# Altium PCB LPCB219R0.PcbDoc (part 1 of 2)
Units mm, origin at the board's own origin, x right, y up, seen from the top; angles counter-clockwise.
Board outline 146 x 183.7 mm, 2 copper layers (Top Layer, Bottom Layer); 93 components, 73 nets, 356 pads, 119 vias.
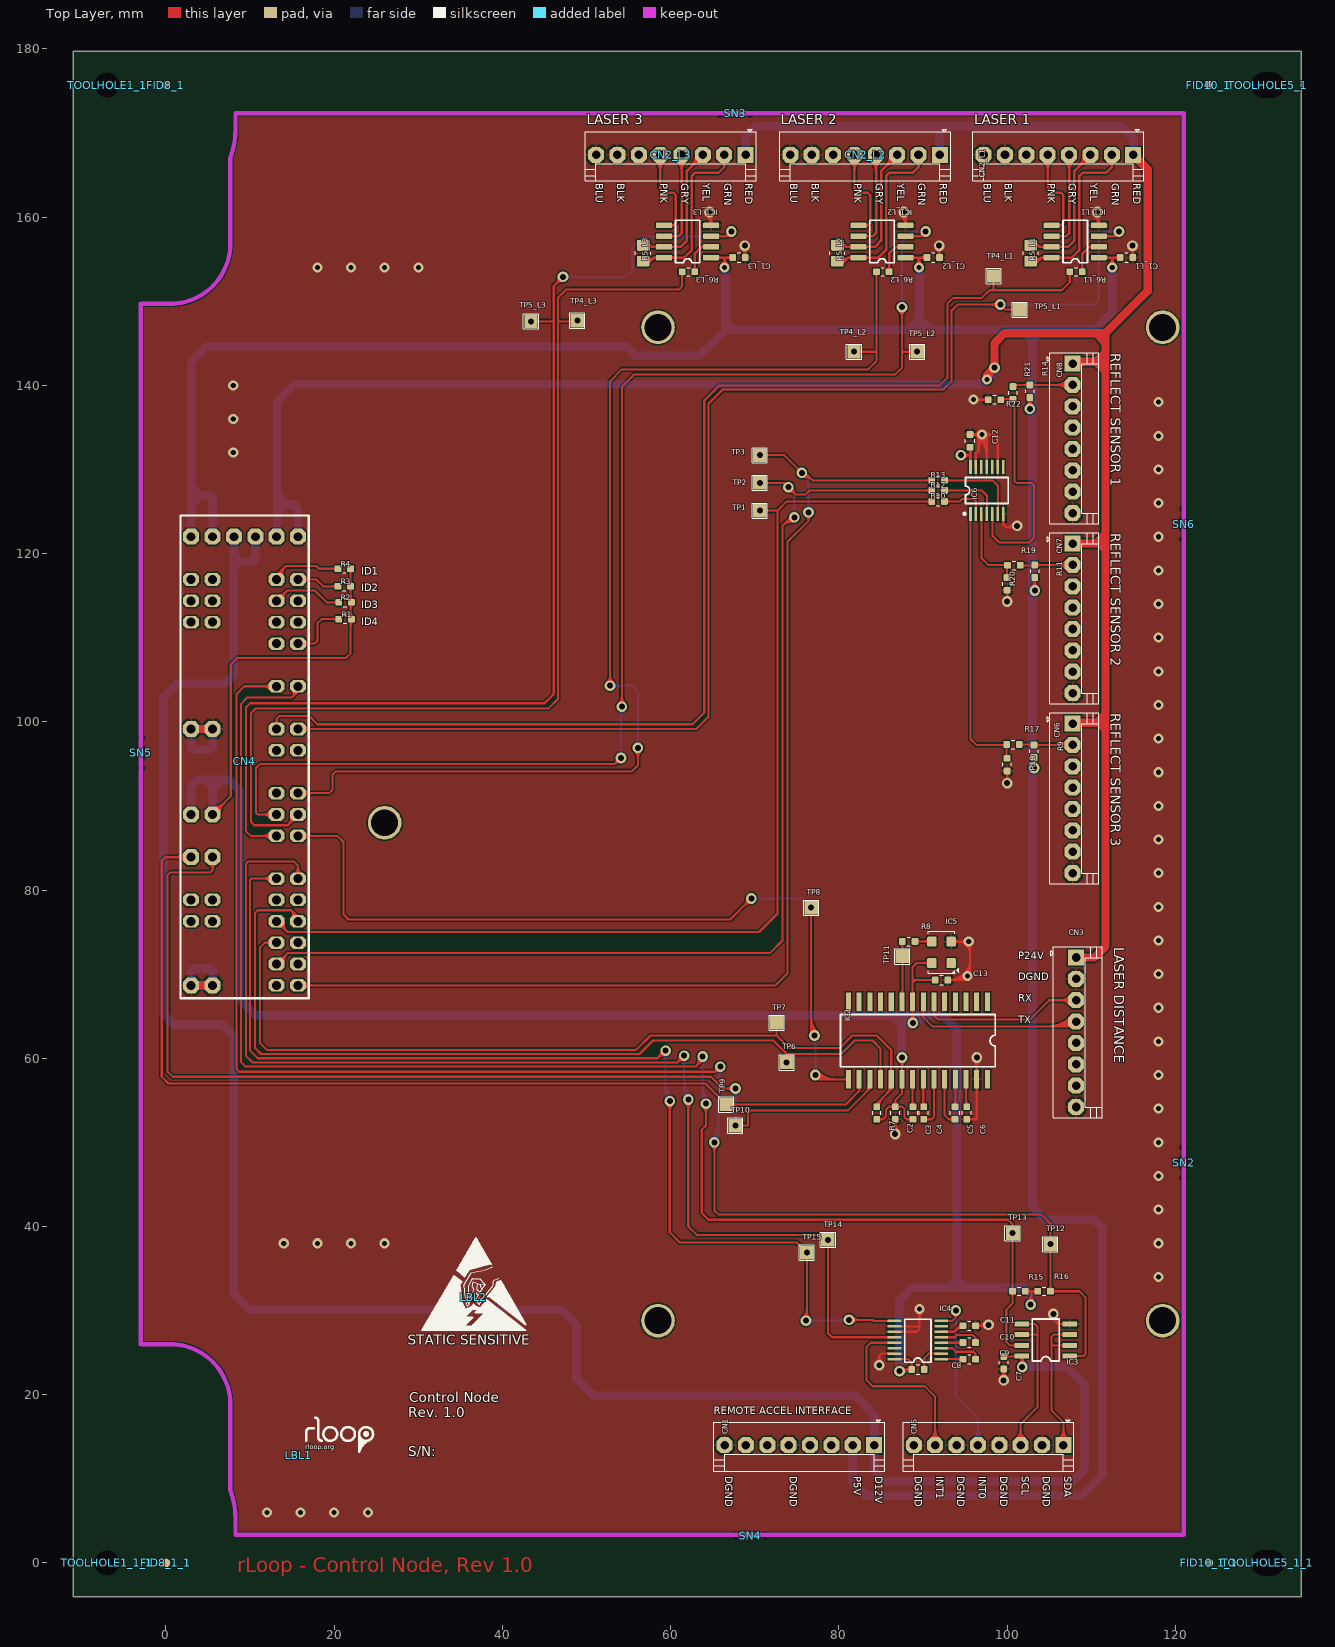
[diagram p0: Top Layer view]
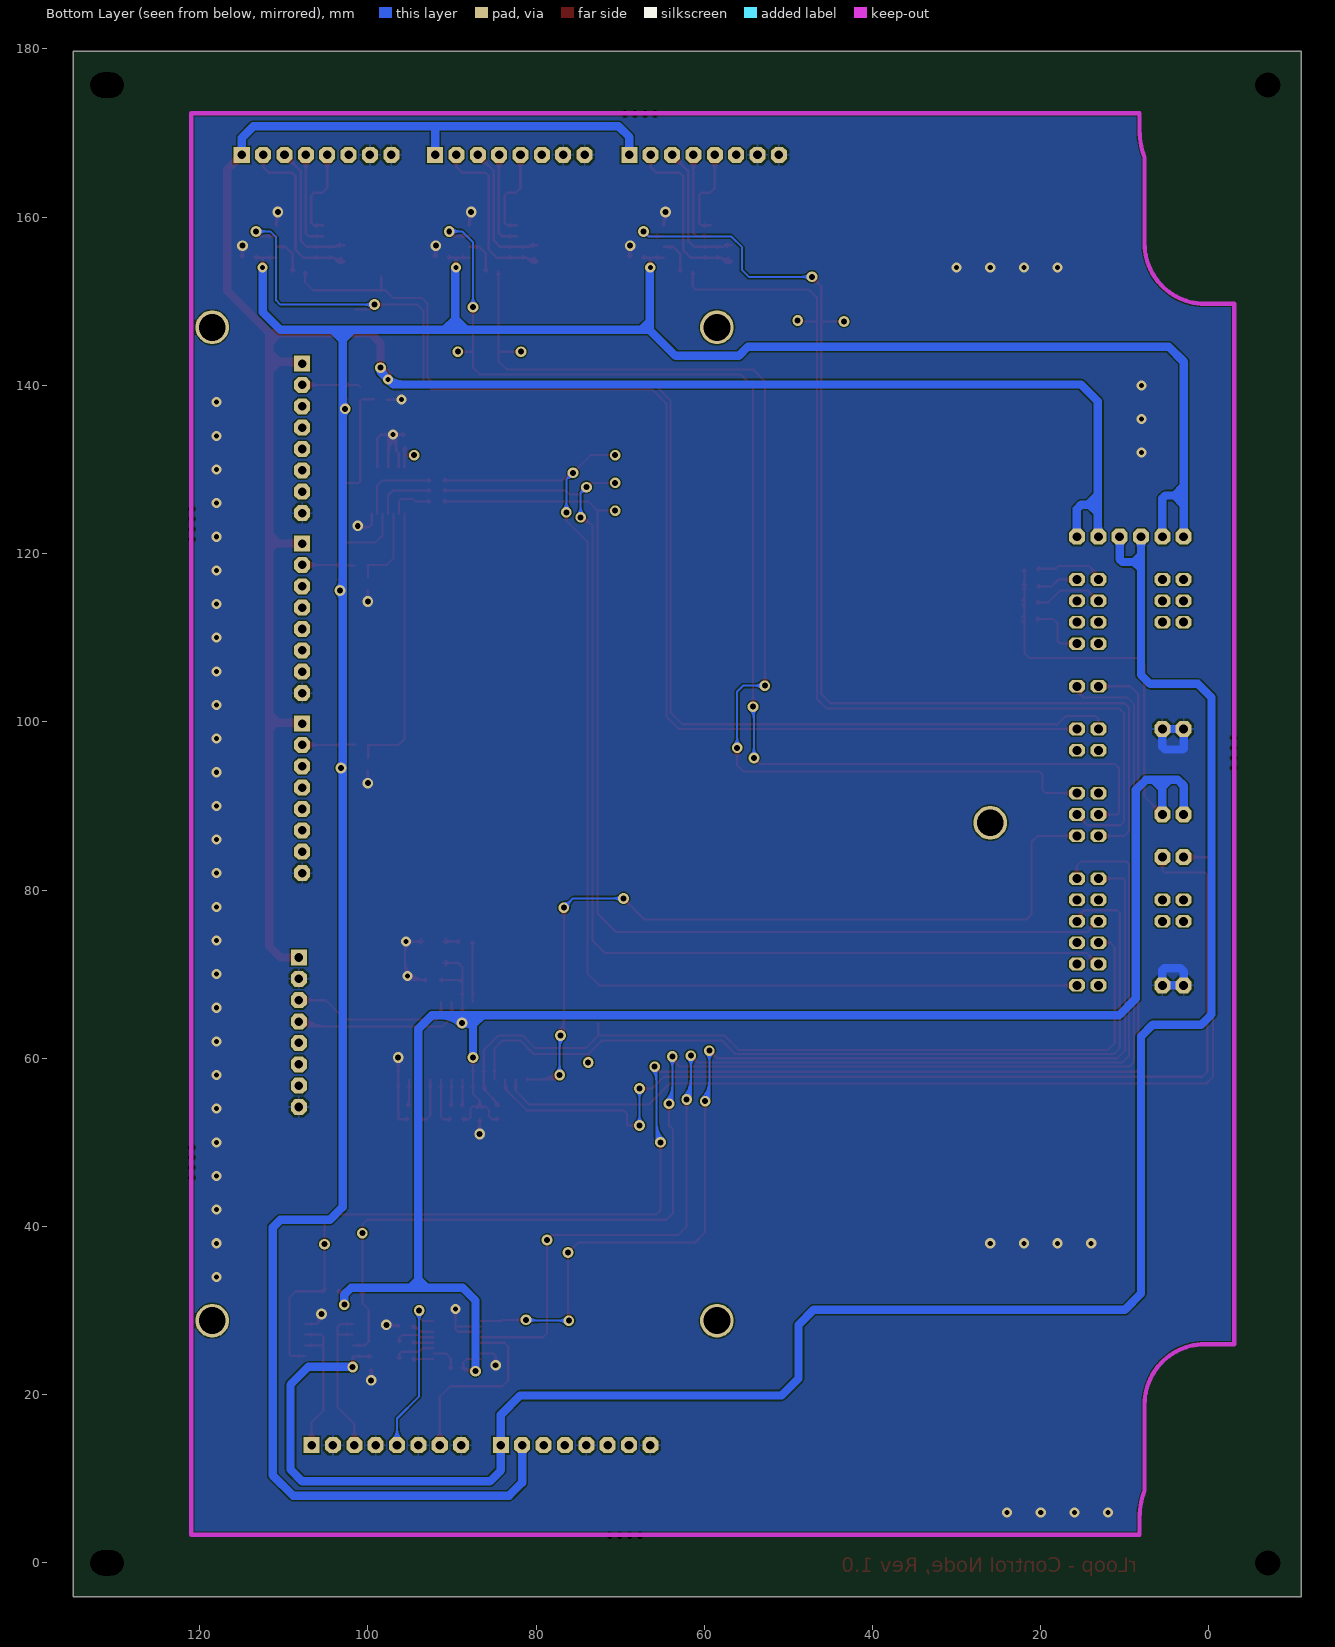
[diagram p1: Bottom Layer view, seen from below]

## Layer stack, top to bottom
Top Layer: signal copper 0.0356
Dielectric: core 0.32, FR-4, Dk 4.8
Bottom Layer: signal copper 0.0356

## Board outline
-11,-4 -11,179.695 135,179.695 135,-4

## Design rules (kind name [scope] priority, off if disabled: settings)
Clearance [All] p1: gap=0.16
HoleSize [All] p1: absolutevalues=TRUE maxlimit=5 minlimit=0.025 maxpercent=80.000 minpercent=20.000
MinimumSolderMaskSliver [All] p1 off: minsoldermaskwidth=0.1
PlaneClearance [All] p1: clearance=0.6
PolygonConnect [IsVia] p1: connectstyle=Direct reliefconductorwidth=0.254 reliefentries=4 polygonreliefangle="90 Angle" airgapwidth=0.254
PolygonConnect PolygonConnect_1 [All] p2: connectstyle=Relief reliefconductorwidth=0.254 reliefentries=4 polygonreliefangle="90 Angle" airgapwidth=0.254
RoomDefinition "LPCB219 - OVERVIEW" [InComponentClass('LPCB219 - OVERVIEW')] p1: confinementstyle=ConfineIn formatcopy=TRUE lockcomponents=FALSE outline -79.611,-108.179 -28.811,-108.179 -28.811,-82.779 -79.611,-82.779
RoomDefinition "U_LPCB219 - NODE CORE" [InComponentClass('U_LPCB219 - NODE CORE')] p2: confinementstyle=ConfineIn formatcopy=TRUE lockcomponents=FALSE outline -79.611,-108.179 -28.811,-108.179 -28.811,-82.779 -79.611,-82.779
RoomDefinition "U_LPCB219 - REMOTE ACCEL IF" [InComponentClass('U_LPCB219 - REMOTE ACCEL IF')] p3: confinementstyle=ConfineIn formatcopy=TRUE lockcomponents=FALSE outline 81.7,20 109.8,20 109.8,34.6 81.7,34.6
RoomDefinition "U_LPCB219 - REFLECT SENSORS" [InComponentClass('U_LPCB219 - REFLECT SENSORS')] p4: confinementstyle=ConfineIn formatcopy=TRUE lockcomponents=FALSE outline 88.675,144.55 88.675,78.65 112.075,78.65 112.075,144.55
RoomDefinition "U_LPCB219 - LASER DISTANCE" [InComponentClass('U_LPCB219 - LASER DISTANCE')] p5: confinementstyle=ConfineIn formatcopy=TRUE lockcomponents=FALSE outline 112.8,49.49 112.8,76.09 78.5,76.09 78.5,49.49
RoomDefinition L3 [InComponentClass('L3')] p6: confinementstyle=ConfineIn formatcopy=TRUE lockcomponents=FALSE outline 70.8,151.2 70.8,170.8 48.421,170.8 48.421,151.2
RoomDefinition L2 [InComponentClass('L2')] p7: confinementstyle=ConfineIn formatcopy=TRUE lockcomponents=FALSE outline 93.9,151.2 93.9,170.8 71.521,170.8 71.521,151.2
RoomDefinition L1 [InComponentClass('L1')] p8: confinementstyle=ConfineIn formatcopy=TRUE lockcomponents=FALSE outline 116.879,151.2 116.879,170.8 94.5,170.8 94.5,151.2
RoutingVias [All] p1: holewidth=0.6 width=1.2 viastyle="Through Hole" minholewidth=0.6 minwidth=1.2 maxholewidth=1 maxwidth=3
SilkToSilkClearance [All] p1 off: silktosilkclearance=0.254
SilkToSolderMaskClearance [IsPad] p1 off: minsilkscreentomaskgap=0.254 clearancetoexposedcopper=TRUE
SolderMaskExpansion [All] p1: expansion=0.102
Width [All] p1: maxlimit=2 minlimit=0.254 preferedwidth=0.254
23 further rules are at their usual default settings.

## Classes and differential pairs
component class L1: C1_L1 CN2_L1 IC1_L1 R5_L1 R6_L1 TP4_L1 TP5_L1
component class L2: C1_L2 CN2_L2 IC1_L2 R5_L2 R6_L2 TP4_L2 TP5_L2
component class L3: C1_L3 CN2_L3 IC1_L3 R5_L3 R6_L3 TP4_L3 TP5_L3
component class "LPCB219 - OVERVIEW": CN1 CN5 LBL1 LBL2 SN2 SN3 SN4 SN5 SN6
component class "U_LPCB219 - LASER DISTANCE": C2 C3 C4 C5 C6 C13 CN3 IC2 IC5 R7 R8 TP6 TP7 TP8 TP9 TP10 TP11
component class "U_LPCB219 - NODE CORE": CN4 R1 R2 R3 R4
component class "U_LPCB219 - REFLECT SENSORS": C12 CN6 CN7 CN8 IC6 R9 R10 R11 R12 R13 R14 R17 R18 R19 R20 R21 R22 TP1 TP2 TP3
component class "U_LPCB219 - REMOTE ACCEL IF": C7 C8 C9 C10 C11 IC3 IC4 R15 R16 TP12 TP13 TP14 TP15
net class LASER_RX[1..3]: LASER_RX1 LASER_RX2 LASER_RX3
net class LASER_TX[1..3]: LASER_TX1 LASER_TX2 LASER_TX3
channel class "LPCB219 - LASER CHANNEL": L1 L2 L3

## Components (designator, comment, footprint, x,y, rotation, side; value= is the part's Value field where it differs from the comment)
C1_L1 "100n / 50V / 10% / SMD 0603" LFP011__CC1608-0603-IPC7351_B 114.2,155.2 r0 top (schematic designator C1)
C1_L2 "100n / 50V / 10% / SMD 0603" LFP011__CC1608-0603-IPC7351_B 91.221,155.2 r0 top (schematic designator C1)
C1_L3 "100n / 50V / 10% / SMD 0603" LFP011__CC1608-0603-IPC7351_B 68.121,155.2 r0 top (schematic designator C1)
C2 "100n / 50V / 10% / SMD 0603" LFP011__CC1608-0603-IPC7351_B 86.7,53.49 r270 top
C3 "100n / 50V / 10% / SMD 0603" LFP011__CC1608-0603-IPC7351_B 88.8,53.49 r90 top
C4 "100n / 50V / 10% / SMD 0603" LFP011__CC1608-0603-IPC7351_B 90.1,53.49 r90 top
C5 "100n / 50V / 10% / SMD 0603" LFP011__CC1608-0603-IPC7351_B 93.8,53.49 r270 top
C6 "100n / 50V / 10% / SMD 0603" LFP011__CC1608-0603-IPC7351_B 95.2,53.49 r270 top
C7 "100n / 50V / 10% / SMD 0603" LFP011__CC1608-0603-IPC7351_B 99.6,23.8 r270 top
C8 "100n / 50V / 10% / SMD 0603" LFP011__CC1608-0603-IPC7351_B 89.4,23 r0 top
C9 "100n / 50V / 10% / SMD 0603" LFP011__CC1608-0603-IPC7351_B 95.5,24.2 r0 top
C10 "100n / 50V / 10% / SMD 0603" LFP011__CC1608-0603-IPC7351_B 95.5,26.2 r0 top
C11 "100n / 50V / 10% / SMD 0603" LFP011__CC1608-0603-IPC7351_B 95.5,28.2 r0 top
C12 "100n / 50V / 10% / SMD 0603" LFP011__CC1608-0603-IPC7351_B 95.6,133.4 r90 top
C13 "100n / 50V / 10% / SMD 0603" LFP011__CC1608-0603-IPC7351_B 92.2,69.29 r0 top
CN1 "640456-8" 640456-8 75.3,14 r180 top
CN2_L1 "640456-8" 640456-8 106.1,167.4 r180 top (schematic designator CN2)
CN2_L2 "640456-8" 640456-8 83.121,167.4 r180 top locked (schematic designator CN2)
CN2_L3 "640456-8" 640456-8 60.021,167.4 r180 top (schematic designator CN2)
CN3 "640456-8" 640456-8 108.2,63.09 r270 top
CN4 "RLOOP_NODE_CORE" RLOOP_NODE_CORE 3,122 r270 top locked
CN5 "640456-8" 640456-8 97.8,14 r180 top
CN6 "640456-8" 640456-8 107.8,90.9 r270 top
CN7 "640456-8" 640456-8 107.8,112.3 r270 top
CN8 "640456-8" 640456-8 107.8,133.7 r270 top
FID8_1 "FIDUCIAL" FIDTOP 0,175.695 r0 top
FID8_1_1 "FIDUCIAL" FIDTOP 0,0 r0 top
FID10_1 "FIDUCIAL" FIDTOP 124,175.695 r0 top
FID10_1_1 "FIDUCIAL" FIDTOP 124,0 r0 top
IC1_L1 "DS8921AMX/NOPB" LFP069__R-8G 108.1,157.1 r90 top (schematic designator IC1)
IC1_L2 "DS8921AMX/NOPB" LFP069__R-8G 85.121,157.1 r90 top (schematic designator IC1)
IC1_L3 "DS8921AMX/NOPB" LFP069__R-8G 62.021,157.1 r90 top (schematic designator IC1)
IC2 "MAX3111EEWI+G36" LFP024__SOIC300-28 89.4,62.09 r180 top
IC3 "P82B96D" LFP097__SOIC150-8 104.6,26.5 r90 top
IC4 "MAX3232CPWR" LFP049__TSSOP-16 89.4,26.5 r90 top
IC5 "SG5032CAN 1.843200M-TJGA3" LFP072__ASFLMB 92.2,72.59 r90 top
IC6 "SN74HC14PW" PW014 97.6,127.5 r0 top
LBL1 "RLOOP_LOGO" RLOOP_LOGO 15.8,12.8 r0 top
LBL2 "STATIC LABEL" STATIC_LABEL 36.6,31.6 r0 top
R1 "0R / 0.1W / SMD 0603" LFP020__CR1608-0603-IPC7351_B 21.3,112.2 r0 top
R2 "0R / 0.1W / SMD 0603" LFP020__CR1608-0603-IPC7351_B 21.3,114.2 r0 top
R3 "0R / 0.1W / SMD 0603" LFP020__CR1608-0603-IPC7351_B 21.2,116.1 r0 top
R4 "0R / 0.1W / SMD 0603" LFP020__CR1608-0603-IPC7351_B 21.2,118.2 r0 top
R5_L1 "120R / 0.25W / SMD 0805" LFP029__CR2012-0805 102.8,155.7 r90 top (schematic designator R5)
R5_L2 "120R / 0.25W / SMD 0805" LFP029__CR2012-0805 79.821,155.7 r90 top (schematic designator R5)
R5_L3 "120R / 0.25W / SMD 0805" LFP029__CR2012-0805 56.721,155.7 r90 top (schematic designator R5)
R6_L1 "2.2K / 0.1W / 1% / SMD 0603" LFP020__CR1608-0603-IPC7351_B 108.2,153.5 r0 top (schematic designator R6)
R6_L2 "2.2K / 0.1W / 1% / SMD 0603" LFP020__CR1608-0603-IPC7351_B 85.221,153.5 r0 top (schematic designator R6)
R6_L3 "2.2K / 0.1W / 1% / SMD 0603" LFP020__CR1608-0603-IPC7351_B 62.121,153.5 r0 top (schematic designator R6)
R7 "10K / 0.1W / 1% / SMD 0603" LFP020__CR1608-0603-IPC7351_B 84.5,53.49 r270 top
R8 "47R / 0.1W / 1% / SMD 0603" LFP020__CR1608-0603-IPC7351_B 88.3,73.89 r180 top
R9 "2.2K / 0.1W / 1% / SMD 0603" LFP020__CR1608-0603-IPC7351_B 103.2,96.5 r270 top
R10 "2.2K / 0.1W / 1% / SMD 0603" LFP020__CR1608-0603-IPC7351_B 91.8,126.2 r0 top
R11 "2.2K / 0.1W / 1% / SMD 0603" LFP020__CR1608-0603-IPC7351_B 103.3,117.9 r270 top
R12 "2.2K / 0.1W / 1% / SMD 0603" LFP020__CR1608-0603-IPC7351_B 91.8,127.5 r0 top
R13 "2.2K / 0.1W / 1% / SMD 0603" LFP020__CR1608-0603-IPC7351_B 91.8,128.7 r0 top
R14 "2.2K / 0.1W / 1% / SMD 0603" LFP020__CR1608-0603-IPC7351_B 102.7,139.3 r270 top
R15 "4.7K / 0.1W / 1% / SMD 0603" LFP020__CR1608-0603-IPC7351_B 101.4,32.3 r0 top
R16 "4.7K / 0.1W / 1% / SMD 0603" LFP020__CR1608-0603-IPC7351_B 104.4,32.3 r180 top
R17 "2.2K / 0.1W / 1% / SMD 0603" LFP020__CR1608-0603-IPC7351_B 100.7,97.3 r180 top
R18 "330R / 0.100W / 1% / SMD 0603" LFP020__CR1608-0603-IPC7351_B 100,94.9 r90 top
R19 "2.2K / 0.1W / 1% / SMD 0603" LFP020__CR1608-0603-IPC7351_B 100.8,118.6 r180 top
R20 "330R / 0.100W / 1% / SMD 0603" LFP020__CR1608-0603-IPC7351_B 100,116.4 r90 top
R21 "2.2K / 0.1W / 1% / SMD 0603" LFP020__CR1608-0603-IPC7351_B 100.7,139.1 r270 top
R22 "330R / 0.100W / 1% / SMD 0603" LFP020__CR1608-0603-IPC7351_B 98.5,138.3 r0 top
SN2 "PCB_SNAPOUT" SNAPOUT_NEW 121,45.8 r90 top
SN3 "PCB_SNAPOUT" SNAPOUT_NEW 69.452,172.348 r180 top
SN4 "PCB_SNAPOUT" SNAPOUT_NEW 71.252,3.248 r180 top
SN5 "PCB_SNAPOUT" SNAPOUT_NEW -3,94.5 r90 top
SN6 "PCB_SNAPOUT" SNAPOUT_NEW 121,121.7 r90 top
TOOLHOLE1_1 "Comment" TOOL-1#1 -7,175.695 r0 top
TOOLHOLE1_1_1 "Comment" TOOL-1#1 -7,0 r0 top
TOOLHOLE5_1 "Comment" TOOL-1#2 131,175.695 r0 top
TOOLHOLE5_1_1 "Comment" TOOL-1#2 131,0 r0 top
TP1 "SMD_TP" SMD-TP 70.6,125.1 r0 top
TP2 "SMD_TP" SMD-TP 70.6,128.4 r90 top
TP3 "SMD_TP" SMD-TP 70.6,131.7 r90 top
TP4_L1 "SMD_TP" SMD-TP 98.4,153 r0 top (schematic designator TP4)
TP4_L2 "SMD_TP" SMD-TP 81.8,144 r90 top (schematic designator TP4)
TP4_L3 "SMD_TP" SMD-TP 48.9,147.7 r90 top (schematic designator TP4)
TP5_L1 "SMD_TP" SMD-TP 101.5,149 r0 top (schematic designator TP5)
TP5_L2 "SMD_TP" SMD-TP 89.3,144 r90 top (schematic designator TP5)
TP5_L3 "SMD_TP" SMD-TP 43.4,147.6 r90 top (schematic designator TP5)
TP6 "SMD_TP" SMD-TP 73.8,59.5 r0 top
TP7 "SMD_TP" SMD-TP 72.6,64.2 r0 top
TP8 "SMD_TP" SMD-TP 76.7,77.9 r0 top
TP9 "SMD_TP" SMD-TP 66.6,54.5 r0 top
TP10 "SMD_TP" SMD-TP 67.7,52 r0 top
TP11 "SMD_TP" SMD-TP 87.55,72.1 r0 top
TP12 "SMD_TP" SMD-TP 105.15,37.9 r0 top
TP13 "SMD_TP" SMD-TP 100.65,39.2 r0 top
TP14 "SMD_TP" SMD-TP 78.7,38.4 r0 top
TP15 "SMD_TP" SMD-TP 76.2,36.9 r0 top

## Footprints (in the part's own frame and the unit in brackets; to place one, negate y for a bottom-side part, rotate by r counter-clockwise, add the part's x,y. Pads: shape width x height; smd on the part's side, far side on the other; paste and mask are expansions set on the pad)
640456-8 [mm] "Connector, Male Header, 8 Way"
  rect 1.905x1.905 hole 1.02: 1(-8.89,0)
  oct 1.905x1.905 hole 1.02: 2(-6.35,0) 3(-3.81,0) 4(-1.27,0) 5(1.27,0) 6(3.81,0) 7(6.35,0) 8(8.89,0)
  silkscreen extent -10.15,-3.04 10.17,3.1
FIDTOP [mil]
  round 40 smd mask+39.37: 1(0,0)
LFP011__CC1608-0603-IPC7351_B [mm]
  rrect25% 0.8x0.8 smd: 1(-0.75,0) 2(0.75,0)
  silkscreen extent -0.2,-0.55 0.2,0.55
LFP020__CR1608-0603-IPC7351_B [mm]
  rrect25% 0.8x0.8 smd: 1(-0.75,0) 2(0.75,0)
  silkscreen extent -0.2,-0.5 0.2,0.5
LFP024__SOIC300-28 [mm] "Small Outline; 28 Leads; Body Width 7.5 mm; Pitch 1.27 mm"
  rect 0.6x2.2 smd: 1(-8.255,-4.6) 2(-6.985,-4.6) 3(-5.715,-4.6) 4(-4.445,-4.6) 5(-3.175,-4.6) 6(-1.905,-4.6) 7(-0.635,-4.6) 8(0.635,-4.6) 9(1.905,-4.6) 10(3.175,-4.6) 11(4.445,-4.6) 12(5.715,-4.6) 13(6.985,-4.6) 14(8.255,-4.6) 15(8.255,4.6) 16(6.985,4.6) 17(5.715,4.6) 18(4.445,4.6) 19(3.175,4.6) 20(1.905,4.6) 21(0.635,4.6) 22(-0.635,4.6) 23(-1.905,4.6) 24(-3.175,4.6) 25(-4.445,4.6) 26(-5.715,4.6) 27(-6.985,4.6) 28(-8.255,4.6)
  silkscreen extent -9.2,-3.1 9.2,3.1
LFP029__CR2012-0805 [mm]
  rrect25% 1.3x1.5 smd paste-0.01: 1(-0.95,0) 2(0.95,0)
  silkscreen extent -0.2,-0.9 0.2,0.9
LFP049__TSSOP-16 [mm] "Copied from 984E-02"
  rrect25% 0.3x1.65 smd paste-0.03: 1(-2.275,-2.775) 2(-1.625,-2.775) 3(-0.975,-2.775) 4(-0.325,-2.775) 5(0.325,-2.775) 6(0.975,-2.775) 7(1.625,-2.775) 8(2.275,-2.775) 9(2.275,2.775) 10(1.625,2.775) 11(0.975,2.775) 12(0.325,2.775) 13(-0.325,2.775) 14(-0.975,2.775) 15(-1.625,2.775) 16(-2.275,2.775)
  silkscreen extent -2.65,-1.55 2.45,1.55
LFP069__R-8G [mm] "Small Outline; 8 Leads; Body Width 3.9 mm; Pitch 1.27 mm"
  rrect25% 0.65x1.9 smd paste-0.05: 1(-1.905,-2.8) 2(-0.635,-2.8) 3(0.635,-2.8) 4(1.905,-2.8) 5(1.905,2.8) 6(0.635,2.8) 7(-0.635,2.8) 8(-1.905,2.8)
  silkscreen extent -2.52,-1.45 2.52,1.45
LFP072__ASFLMB [mm]
  rrect25% 1.2x1.1 smd paste-0.1: 1(-1.27,-1.15) 2(1.27,-1.15) 3(1.27,1.15) 4(-1.27,1.15)
  silkscreen extent -2.5,-2.05 2.5,1.6
LFP097__SOIC150-8 [mm] "Small Outline, Plastic, Narrow; 8 Leads; Body Width 3.8 mm; Pitch 1.27 mm"
  rrect10% 0.6x1.7 smd paste-0.05: 1(-1.905,-2.85) 2(-0.635,-2.85) 3(0.635,-2.85) 4(1.905,-2.85) 5(1.905,2.85) 6(0.635,2.85) 7(-0.635,2.85) 8(-1.905,2.85)
  silkscreen extent -2.5,-1.6 2.5,1.6
PW014 [mm] "Shrink Small Outline; 14 Leads; Body Width 4.4 mm; Pitch 0.65 mm"
  rect 0.3x1.65 smd: 1(-1.95,-2.775) 2(-1.3,-2.775) 3(-0.65,-2.775) 4(0,-2.775) 5(0.65,-2.775) 6(1.3,-2.775) 7(1.95,-2.775) 8(1.95,2.775) 9(1.3,2.775) 10(0.65,2.775) 11(0,2.775) 12(-0.65,2.775) 13(-1.3,2.775) 14(-1.95,2.775)
  silkscreen extent -2.77,-2.9 2.55,1.55
RLOOP_LOGO [mm]
  silkscreen extent 0.89,0.39 8.82,4.45
RLOOP_NODE_CORE [mil]
  oct 59.06x75 hole 42: A10(200,0) A11(200,100) A12(300,0) A13(300,100) A14(400,0) AGND(400,100) ID1(200,400) ID2(200,500) ID3(300,400) ID4(500,500) ID5(500,400) ID6(400,500) ID7(400,400) ID8(300,500) SCL(700,500) SDA(700,400) T0(900,400) T1(900,500) T2(1000,400) T5(1000,500) T6(1200,400) T7(1200,500) T8(1300,400) T9(1300,500) T10(1400,400) T11(1400,500) T14(1600,400) T15(1600,500) T16(1700,400) T17(1700,500) T20(1800,400) T21(1800,500) T22(1900,400) T23(1900,500) T24(2000,400) T25(2000,500) T26(2100,400) T27(2100,500) T28(1700,0) T31(1700,100) T32(1800,0) T33(1800,100)
  oct 75x75 hole 42: D3V31(1300,0) D3V32(1300,100) D12V1(0,300) D12V2(0,200) GND1(2100,100) GND2(2100,0) GND3(900,100) GND4(900,0) P5V1(0,0) P5V2(0,100) P24V1(0,400) P24V2(0,500) T12(1500,0) T13(1500,100)
  silkscreen extent -100,-50 2160,550
SMD-TP [mm]
  rect 1.6x1.6 smd paste-2: 1(0,0)
  silkscreen extent -0.9,-0.9 0.9,0.9
SNAPOUT_NEW [mm]
  round 0.4 hole 0.8 unplated: 0(0,0) 0(1.2,0) 0(2.4,0) 0(3.6,0)
STATIC_LABEL [mm]
  silkscreen extent -6.16,-3.95 6.18,7.02
TOOL-1#1 [mm]
  round 2.54 hole 3 unplated: TOOL(0,0)
TOOL-1#2 [mm]
  round 0.076 hole 3 slot 4 at 0 deg unplated: TOOL1(0,0)

## Part data
C1_L1 C1_L2 C1_L3 C2 C3 C4 C5 C6 C7 C12 C13: "Capacitor, Ceramic Chip, 100nF (0.1uF), 50V, 5%, SMD 0603 [LCA016]"
C8 C9 C10 C11: "Capacitor, Ceramic Chip, 100nF, 50V, 10%, SMD 0603"
CN1 CN2_L1 CN2_L2 CN2_L3 CN3 CN5 CN6 CN7 CN8: "Connector, Male Header, 8 Way"
CN4: "rLoop Node Core Connector"
IC1_L1 IC1_L2 IC1_L3: "IC, RS422 Tx Rx, SMD SOIC 8"
IC2: "IC, SPI UART Interface, SMD SOIC28 [LIC541]"
IC3: "IC, I2C Line Driver [LIC571]"
IC4: "IC, RS232 Line Driver, 3.3V, SMD TSSOP16"
IC5: "IC, Oscillator Module, 1.8432MHz, 3.3V, SMD [LIC508]"
IC6: "IC, Hex Inveter, Schmitt Trigger, SMD [LIC160]"
R1 R2 R3 R4: "Resistor, Ceramic Chip, 0R, 0.1W, SMD 0603 [LRE026]"
R5_L1 R5_L2 R5_L3: "Resistor, Thick Film, 120R, 0.25W, 5%, SMD 0805 [LRE190]"
R6_L1 R6_L2 R6_L3 R9 R10 R11 R12 R13 R14 R17 R19 R21: "Resistor, Ceramic Chip, 2.2K, 0.1W, 1%, SMD 0603 [LRE027]"
R7: "Resistor, Ceramic Chip, 10K, 0.1W, 1%, SMD 0603 [LRE030]"
R8: "Resistor, Ceramic Chip, 47R, 0.1W, 1%, SMD 0603 [LRE037]"
R15 R16: "Resistor, Ceramic Chip, 4K7, 0.1W, 1%, SMD 0603 [LRE058]"
R18 R20 R22: "Resistor, Thick Film, 330R, 0.100W, 75V, 1%, SMD 0603 [LRE219]"
TP1 TP2 TP3 TP4_L1 TP4_L2 TP4_L3 TP5_L1 TP5_L2 TP5_L3 TP6 TP7 TP8 TP9 TP10 TP11 TP12 TP13 TP14 TP15: "SMD Test Point"

## Free pads (board coordinates)
  round 4 hole 3.2: B(26,88) B(58.5,28.8) B(58.5,146.9) B(118.5,28.8) B(118.5,146.9)

## Via types
v1: diameter 1.27, hole 0.711, Top Layer to Bottom Layer, 68 vias
v2: diameter 1.2, hole 0.6, Top Layer to Bottom Layer, 51 vias

## Nets (pads, with @x,y where several pads share a name; then routed paths per layer and width w, separated by ;. In a path a pad name is that pad's centre, name@x,y a point inside that pad or via, vN(x,y) a via of type N, cw(c..) or ccw(c..) an arc to the next point about the centre after c; other vN are vias at no path point)
ACCEL0_NINT: CN4.T14 IC4.9 TP15.1 | length 157.6
  Top Layer w0.254: CN4.T14@12.517,80.919 ccw(c11.453,79.856) 11.453,81.36 ccw(c11.453,82.864) CN4.T14@12.517,81.801 ; CN4.T14@12.697,81.099 ccw(c12.067,80.469) 12.067,81.36 ccw(c12.067,82.251) CN4.T14@12.697,81.621 ; CN4.T14@13.16,81.36 10.16,81.36 10,81.2 10,60.9 10.9,60 58.4,60 ; 58.604,60.204 ccw(c57.907,60.9) v1@58.892,60.9 ; 58.817,60.417 cw(c59.371,59.863) v1@59.393,60.646 ; v1@59.386,60.392 ccw(c59.348,59.052) 58.4,60 ; v1(59.4,60.9) 59.3,60.9 58.4,60 ; v1@59.541,54.541 cw(c58.674,53.674) 59.9,53.674 cw(c61.126,53.674) v1@60.259,54.541 ; v1(59.9,54.9) 59.9,39.3 61.1,38.1 75,38.1 v1(76.2,36.9) 76.2,28.8 v1(76.1,28.8) ; v1@75.741,29.159 ccw(c74.632,30.268) 76.2,30.268 ; v1@75.92,28.98 ccw(c75.245,29.655) 76.2,29.655 ; 76.2,29.785 ccw(c77.085,29.785) v1@76.459,29.159 ; v1(81.2,28.9) 84,28.9 84.125,28.775 IC4.9@86.625,28.775 ; v1@81.559,28.541 cw(c82.426,27.674) 82.426,28.9 cw(c82.426,30.126) v1@81.559,29.259
  Bottom Layer w0.254: v1@59.041,60.541 cw(c58.174,59.674) 59.4,59.674 cw(c60.626,59.674) v1@59.759,60.541 ; 59.4,55.494 ccw(c60.494,55.494) v1@59.72,54.72 ; 59.4,56.107 ccw(c61.107,56.107) v1(59.9,54.9) 59.4,55.4 v1(59.4,60.9) ; 59.4,56.72 ccw(c61.72,56.72) v1@60.08,55.08 ; 59.4,57.334 ccw(c62.334,57.334) v1@60.259,55.259 ; v1(76.1,28.8) 81.3,28.8 81.4,28.9 v1(81.2,28.9) ; v1@76.459,28.441 cw(c77.326,27.574) 77.326,28.8 cw(c77.326,30.026) v1@76.459,29.159 ; 79.732,28.8 ccw(c79.732,30.368) v1@80.841,29.259 ; 80.215,28.8 cw(c80.215,27.915) v1@80.841,28.541 ; 80.345,28.8 ccw(c80.345,29.755) v1@81.02,29.08
ACCEL1_NINT: CN4.T15 IC4.12 TP14.1 | length 156.3
  Top Layer w0.254: CN4.T15@15.259,81.801 ccw(c14.196,82.864) 15.7,82.864 ccw(c17.204,82.864) CN4.T15@16.141,81.801 ; CN4.T15@15.439,81.621 ccw(c14.809,82.251) 15.7,82.251 ccw(c16.591,82.251) CN4.T15@15.961,81.621 ; CN4.T15@15.7,81.36 15.7,82.9 15.2,83.4 9.8,83.4 9.5,83.1 9.5,60.3 10.3,59.5 60.8,59.5 ; v1@61.093,60.27 cw(c60.089,60.211) 60.8,59.5 ; v1@61.57,59.793 ccw(c61.511,58.789) 60.8,59.5 ; v1(61.6,60.3) 60.8,59.5 ; v1@61.741,54.741 cw(c60.874,53.874) 62.1,53.874 cw(c63.326,53.874) v1@62.459,54.741 ; v1(62.1,55.1) 62.1,40 63.1,39 78.1,39 v1(78.7,38.4) 78.7,27.3 79.175,26.825 IC4.12@86.625,26.825
  Bottom Layer w0.254: v1@61.241,59.941 cw(c60.374,59.074) 61.6,59.074 cw(c62.826,59.074) v1@61.959,59.941 ; 61.6,55.694 ccw(c62.694,55.694) v1@61.92,54.92 ; 61.6,56.307 ccw(c63.307,56.307) v1(62.1,55.1) 61.6,55.6 v1(61.6,60.3) ; 61.6,56.92 ccw(c63.92,56.92) v1@62.28,55.28 ; 61.6,57.534 ccw(c64.534,57.534) v1@62.459,55.459
ACCEL_I2C_SCL: CN4.SCL IC3.7 R15.1 TP13.1 | length 195.4
  Top Layer w0.254: CN4.SCL@15.029,103.809 cw(c14.53,103.37) 15,102.9 ; 15.192,103.092 ccw(c14.734,103.549) CN4.SCL@15.22,103.976 ; 15.383,103.283 ccw(c14.938,103.729) CN4.SCL@15.411,104.144 ; CN4.SCL@15.7,104.22 15.7,103.6 15,102.9 ; v1@63.306,60.082 cw(c62.186,59.814) 63,59 ; 63.321,59.321 ccw(c62.704,59.938) v1@63.553,60.141 ; v1(63.8,60.2) 63.8,59.8 63,59 ; v1@63.841,54.241 cw(c62.974,53.374) 64.2,53.374 cw(c65.426,53.374) v1@64.559,54.241 ; v1(64.2,54.6) 64.2,52 63.7,51.5 63.7,41.6 64.5,40.8 100.1,40.8 100.65,40.25 R15.1@100.65,32.3 100.65,30.85 99.9,30.1 99.9,26.3 100.335,25.865 IC3.7@101.75,25.865 ; R15.1@100.457,32.107 cw(c99.991,31.641) 100.65,31.641 cw(c101.309,31.641) R15.1@100.843,32.107 ; R15.1@100.457,32.493 ccw(c99.991,32.959) 100.65,32.959 ccw(c101.309,32.959) R15.1@100.843,32.493 ; IC3.7@101.078,25.743 ccw(c100.782,25.447) 100.782,25.865 ccw(c100.782,26.283) IC3.7@101.078,25.987 ; 15,102.9 9.7,102.9 8.9,102.1 8.9,59.6 9.5,59 63,59
  Bottom Layer w0.254: v1@63.441,59.841 cw(c62.574,58.974) 63.8,58.974 cw(c65.026,58.974) v1@64.159,59.841 ; 63.8,55.566 ccw(c65.166,55.566) v1(64.2,54.6) 63.8,55 v1(63.8,60.2) ; 63.8,56.179 ccw(c65.779,56.179) v1@64.38,54.78 ; 63.8,56.792 ccw(c66.392,56.792) v1@64.559,54.959
  other v1: 100.65,39.2
ACCEL_I2C_SDA: CN4.SDA IC3.1 R16.1 TP12.1 | length 205.5
  Top Layer w0.254: CN4.SDA@12.517,103.779 ccw(c11.453,102.716) 11.453,104.22 ccw(c11.453,105.724) CN4.SDA@12.517,104.661 ; CN4.SDA@12.697,103.959 ccw(c12.067,103.329) 12.067,104.22 ccw(c12.067,105.111) CN4.SDA@12.697,104.481 ; CN4.SDA@13.16,104.22 9.32,104.22 8.4,103.3 8.4,58.7 8.7,58.4 65.3,58.4 ; v1@64.841,49.641 cw(c63.974,48.774) 65.2,48.774 cw(c66.426,48.774) v1@65.559,49.641 ; v1(65.2,50) 65.2,41.9 65.7,41.4 104.1,41.4 105.15,40.35 R16.1@105.15,32.3 108.6,32.3 109.3,31.6 109.3,24.8 109.095,24.595 IC3.1@107.45,24.595 ; v1@65.414,58.853 cw(c64.979,58.721) 65.3,58.4 ; v1@65.753,58.514 ccw(c65.621,58.079) 65.3,58.4 ; v1(65.9,59) 65.3,58.4 ; R16.1@104.957,32.493 ccw(c104.491,32.959) 105.15,32.959 ccw(c105.809,32.959) 105.343,32.493 ccw(c105.809,32.959) 105.809,32.3 ccw(c105.809,31.641) R16.1@105.343,32.107 ; IC3.1@108.122,24.473 cw(c108.418,24.177) 108.418,24.595 cw(c108.418,25.013) IC3.1@108.122,24.717
  Bottom Layer w0.254: v1@64.841,50.359 ccw(c62.766,52.434) 65.7,52.434 ; v1@65.02,50.18 ccw(c63.38,51.82) 65.7,51.82 ; v1@65.38,49.82 ccw(c64.606,50.594) 65.7,50.594 ; v1@65.541,58.641 cw(c65.156,58.256) 65.7,58.256 ; 65.7,51.207 cw(c63.993,51.207) v1(65.2,50) 65.7,50.5 65.7,58.8 v1(65.9,59) ; 65.7,57.291 cw(c67.609,57.291) v1@66.259,58.641 ; 65.7,57.904 cw(c66.996,57.904) v1@66.08,58.82
  other v1: 105.15,37.9
AGND: CN4.AGND
D3V3A: C2.1 C3.1 C8.1 C13.1 CN4.D3V31 CN4.D3V32 IC2.8 IC2.20 IC4.16 IC5.4 R1.2 R2.2 R3.2 R4.2 R7.2 R15.2 R16.2 | length 319.6
  Top Layer w0.254: CN4.D3V32@5.54,88.98 7.7,91.14 7.7,106.8 8.5,107.6 21.4,107.6 21.95,108.15 R3.2@21.95,116.1 R4.2@21.95,118.2 ; CN4.D3V32@5.54,89.551 ccw(c5.54,90.931) 6.516,89.956 ccw(c7.491,88.98) CN4.D3V32@6.111,88.98 ; CN4.D3V32@5.54,89.805 ccw(c5.54,91.798) 6.949,90.389 ccw(c8.358,88.98) CN4.D3V32@6.365,88.98 ; R3.2@21.757,115.907 cw(c21.291,115.441) 21.95,115.441 cw(c22.609,115.441) R3.2@22.143,115.907 ; R3.2@21.757,116.293 ccw(c21.291,116.759) 21.95,116.759 ccw(c22.609,116.759) R3.2@22.143,116.293 ; R4.2@21.757,118.007 cw(c21.291,117.541) 21.95,117.541 cw(c22.609,117.541) R4.2@22.143,118.007 ; R1.2@21.857,112.007 cw(c21.632,111.782) 21.95,111.782 ; R1.2@21.857,112.393 ccw(c21.632,112.618) 21.95,112.618 ; R2.2@21.857,114.007 cw(c21.632,113.782) 21.95,113.782 ; R2.2@21.857,114.393 ccw(c21.632,114.618) 21.95,114.618 ; 21.95,111.3 cw(c22.95,111.3) R1.2@22.243,112.007 ; 21.95,113.1 ccw(c22.95,113.1) R1.2@22.243,112.393 ; 21.95,113.3 cw(c22.95,113.3) R2.2@22.243,114.007 ; 21.95,115.1 ccw(c22.95,115.1) R2.2@22.243,114.393 ; R7.2@84.5,52.74 85.25,52.74 85.6,53.09 85.6,53.89 85.95,54.24 C2.1@86.7,54.24 ; R7.2@84.693,52.547 cw(c85.159,52.081) 85.159,52.74 cw(c85.159,53.399) R7.2@84.693,52.933 ; C2.1@86.507,54.047 ccw(c86.041,53.581) 86.041,54.24 ccw(c86.041,54.899) 86.507,54.433 ccw(c86.041,54.899) 86.7,54.899 ccw(c87.359,54.899) 86.893,54.433 ccw(c87.359,54.899) 87.359,54.24 ccw(c87.359,53.581) C2.1@86.893,54.047 ; IC4.16@86.625,24.225 88.275,24.225 88.65,23.85 C8.1@88.65,23 ; v1@87.141,59.731 cw(c86.286,58.876) 87.495,58.876 ; v1(87.2,22.8) 87.4,23 C8.1@88.65,23 ; IC2.20@87.373,56.568 cw(c87.077,56.272) 87.495,56.272 cw(c87.913,56.272) IC2.20@87.617,56.568 ; IC2.20@87.373,58.412 ccw(c87.077,58.708) 87.495,58.708 ccw(c87.913,58.708) IC2.20@87.617,58.412 ; v1@87.4,22.644 cw(c88.13,22.075) 88.13,23 ; 87.495,58.852 cw(c88.738,58.852) v1@87.859,59.731 ; v1(87.5,60.09) 87.495,60.085 IC2.20@87.495,57.49 87.495,55.785 86.7,54.99 C2.1@86.7,54.24 ; v1@87.559,23.159 ccw(c87.944,23.544) 87.944,23 ; v1@87.601,22.488 cw(c88.65,21.669) C8.1@88.65,23 ; v1@88.441,64.549 ccw(c87.658,65.332) 88.765,65.332 ; C8.1@88.457,22.807 ccw(c87.991,22.341) 87.991,23 ccw(c87.991,23.659) 88.457,23.193 ccw(c87.991,23.659) 88.65,23.659 ccw(c89.309,23.659) C8.1@88.843,23.193 ; C3.1@88.607,52.547 ccw(c88.141,52.081) 88.141,52.74 ccw(c88.141,53.399) C3.1@88.607,52.933 ; IC2.8@88.643,65.768 cw(c88.347,65.472) 88.765,65.472 cw(c89.183,65.472) IC2.8@88.887,65.768 ; IC2.8@88.643,67.612 ccw(c88.347,67.908) 88.765,67.908 ccw(c89.183,67.908) IC2.8@88.887,67.612 ; 88.765,64.888 ccw(c89.498,64.888) v1@88.98,64.37 ; 88.765,65.501 ccw(c90.111,65.501) v1@89.159,64.549 ; C3.1@88.8,52.74 88.05,52.74 87.8,52.99 87.8,53.99 87.55,54.24 C2.1@86.7,54.24 ; v1(88.8,64.19) 88.765,64.225 IC2.8@88.765,66.69 88.765,68.99 ; IC5.4@90.751,71.021 ccw(c90.029,70.299) 90.029,71.32 ccw(c90.029,72.341) IC5.4@90.751,71.619 ; IC5.4@91.05,71.32 89.23,71.32 88.765,70.855 88.765,69.49 ; C13.1@91.257,69.097 ccw(c90.791,68.631) 90.791,69.29 ccw(c90.791,69.949) C13.1@91.257,69.483 ; C13.1@91.45,69.29 89.1,69.29 ; R15.2@102.15,32.3 102.9,32.3 ; R15.2@102.343,32.107 cw(c102.809,31.641) 102.809,32.3 cw(c102.809,32.959) R15.2@102.343,32.493 ; v1@102.441,31.059 ccw(c101.332,32.168) 102.9,32.168 ; v1@102.62,30.88 ccw(c101.945,31.555) 102.9,31.555 ; v1(102.8,30.7) 102.9,30.7 102.9,32.3 ; 102.9,31.685 ccw(c103.785,31.685) v1@103.159,31.059 ; R16.2@103.457,32.107 ccw(c102.991,31.641) 102.991,32.3 ccw(c102.991,32.959) R16.2@103.457,32.493 ; R16.2@103.65,32.3 102.9,32.3 ; 88.765,68.99 88.8,68.99 89.1,69.29 ; 88.765,68.99 88.765,69.29 ; 88.765,69.29 88.965,69.29 ; 88.765,69.29 88.765,69.49 ; 88.765,69.49 88.965,69.29 ; 88.965,69.29 89.1,69.29
  Bottom Layer w1: CN4.D3V31@2.68,89.3 ccw(c1.908,90.072) 3,90.072 ccw(c4.092,90.072) CN4.D3V31@3.32,89.3 ; CN4.D3V31@3,88.98 3,92.4 3.7,93.1 4.7,93.1 ; CN4.D3V32@5.22,89.3 ccw(c4.448,90.072) 5.54,90.072 ccw(c6.632,90.072) CN4.D3V32@5.86,89.3 ; CN4.D3V32@5.54,88.98 5.54,92.26 ; v1(87.2,22.8) 87.2,31.2 88.7,32.7 93,32.7 ; v1(87.5,60.09) 87.5,63.8 ; 88.188,64.802 cw(c88.909,64.081) 88.909,65.1 ; v1@88.751,64.064 ccw(c88.328,62.972) 87.5,63.8 ; v1(88.8,64.19) 88.345,64.645 ; v1@88.895,64.095 cw(c91.323,61.667) 91.323,65.1 ; v1(102.8,30.7) 102.8,31.9 102,32.7 95,32.7 ; 4.7,93.1 5.54,92.26 ; 4.7,93.1 5.6,93.1 ; 5.54,92.26 5.54,93.04 5.6,93.1 ; 5.54,92.26 5.76,92.26 6.6,93.1 ; 5.6,93.1 6.6,93.1 ; 6.6,93.1 7.5,93.1 8.7,91.9 8.7,67.1 10.7,65.1 86.4,65.1 ; 86.4,65.1 87.5,64 ; 86.4,65.1 87.89,65.1 ; 87.5,63.8 87.5,64 ; 87.5,63.8 88.345,64.645 ; 87.5,64 87.5,64.71 87.89,65.1 ; 87.89,65.1 88.345,64.645 ; 87.89,65.1 88.8,65.1 ; 88.345,64.645 88.8,65.1 ; 88.8,65.1 92.4,65.1 94,63.5 94,33.7 ; 93,32.7 94,33.7 ; 93,32.7 94,32.7 ; 94,32.7 94,33.7 ; 94,32.7 95,32.7 ; 94,33.7 95,32.7
D5VA: C12.1 IC6.14 | length 6.3
  Top Layer w0.3: v1(94.5,131.7) 95.65,131.7 ; v1@94.847,131.361 cw(c95.65,130.579) 95.65,131.7 ; v1@94.847,132.039 ccw(c95.65,132.821) 95.65,131.7 ; C12.1@95.423,132.473 cw(c94.876,131.926) 95.65,131.926 ; C12.1@95.6,132.65 95.65,132.6 95.65,131.7 ; IC6.14@95.65,130.275 95.65,131.7 ; 95.65,132.167 cw(c96.083,132.167) C12.1@95.777,132.473
D12VA: C7.1 CN1.1 CN4.D12V1 CN4.D12V2 IC3.8 | length 263.3
  Top Layer w0.254: C7.1@99.6,24.55 101.705,24.55 IC3.8@101.75,24.595 ; C7.1@99.793,24.357 cw(c100.259,23.891) 100.259,24.55 cw(c100.259,25.209) C7.1@99.793,24.743 ; 100.674,24.55 ccw(c100.674,25.121) IC3.8@101.078,24.717 ; 100.891,24.55 cw(c100.891,24.286) IC3.8@101.078,24.473 ; v1@101.441,23.659 ccw(c100.694,24.406) IC3.8@101.75,24.406 ; IC3.8@101.628,24.473 cw(c101.332,24.177) 101.75,24.177 cw(c102.168,24.177) IC3.8@101.872,24.473 ; 101.75,24.005 ccw(c102.467,24.005) v1@101.974,23.485 ; v1(101.8,23.3) 101.75,23.35 IC3.8@101.75,24.595 ; v1@102.149,23.669 cw(c103.024,24.595) IC3.8@101.75,24.595
  Bottom Layer w1: CN4.D12V2@7.76,121.68 cw(c6.988,120.908) 8.08,120.908 cw(c9.172,120.908) CN4.D12V2@8.4,121.68 ; CN4.D12V2@8.08,122 8.08,119.8 ; CN4.D12V1@10.3,121.68 cw(c9.528,120.908) 10.62,120.908 cw(c11.712,120.908) CN4.D12V1@10.94,121.68 ; CN4.D12V1@10.62,122 10.62,119.32 10.3,119 8.88,119 ; CN1.1@83.87,13.68 cw(c83.098,12.908) 84.19,12.908 cw(c85.282,12.908) CN1.1@84.51,13.68 ; CN1.1@83.87,14.32 ccw(c83.098,15.092) 84.19,15.092 ccw(c85.282,15.092) CN1.1@84.51,14.32 ; v1(101.8,23.3) 107.1,23.3 109.2,21.2 109.2,11.1 107.8,9.7 85.5,9.7 84.19,11.01 CN1.1@84.19,14 84.19,17.61 81.9,19.9 50.8,19.9 48.8,21.9 48.8,28.3 47,30.1 10,30.1 8.08,32.02 8.08,62.6 6.68,64 0.9,64 -0.3,65.2 -0.3,102.9 1.3,104.5 7,104.5 8.08,105.58 8.08,118.2 ; 8.08,118.2 8.88,119 ; 8.08,118.2 8.08,119 ; 8.08,119 8.88,119 ; 8.08,119 8.08,119.8 ; 8.08,119.8 8.88,119
DGND: C1_L1.2 C1_L2.2 C1_L3.2 C2.2 C6.2 C7.2 C11.2 C12.2 C13.2 CN1.5 CN1.8 CN2_L1.7 CN2_L1.8 CN2_L2.7 CN2_L2.8 CN2_L3.7 CN2_L3.8 CN3.2 CN3.8 CN4.GND1 CN4.GND2 CN4.GND3 CN4.GND4 CN5.2 CN5.4 CN5.6 CN5.8 CN6.8 CN7.8 CN8.8 IC1_L1.4 IC1_L2.4 IC1_L3.4 IC2.27 IC3.4 IC4.10 IC4.11 IC4.15 IC5.2 IC6.7 IC6.9 IC6.11 IC6.13 R18.1 R20.1 R22.1 | length 167
  Top Layer w0.254: v1@84.471,23.887 ccw(c83.863,24.6) 84.8,24.6 ; v1(84.8,23.5) 84.8,24.6 ; v1@85.129,23.887 cw(c85.737,24.6) 84.8,24.6 ; v1@86.341,51.349 ccw(c85.474,52.216) 86.7,52.216 ccw(c87.926,52.216) v1@87.059,51.349 ; C2.2@86.507,52.547 cw(c86.041,52.081) 86.7,52.081 cw(c87.359,52.081) C2.2@86.893,52.547 ; IC4.15@86.625,24.875 85.075,24.875 84.8,24.6 ; IC4.11@86.625,27.475 89.275,27.475 89.6,27.8 89.6,28.1 ; IC4.10@86.625,28.125 89.575,28.125 89.6,28.1 ; v1(86.7,50.99) C2.2@86.7,52.74 ; v2@89.266,29.866 cw(c88.458,29.058) 89.6,29.058 cw(c90.742,29.058) v2@89.934,29.866 ; v2@89.6,30.4 89.6,28.1 ; C13.2@93.143,69.097 cw(c93.609,68.631) 93.609,69.29 cw(c93.609,69.949) C13.2@93.143,69.483 ; IC5.2@93.35,73.86 v2(95.44,73.86) 95.6,73.7 95.6,69.9 94.99,69.29 C13.2@92.95,69.29 ccw(c92.95,72.117) v2@94.963,70.132 ; 93.557,69.29 ccw(c93.557,71.518) v2@95.144,69.954 ; IC5.2@93.649,73.561 cw(c94.371,72.839) 94.371,73.86 cw(c94.371,74.881) IC5.2@93.649,74.159 ; 94.165,69.29 ccw(c94.165,70.92) 95.325,69.775 ccw(c94.66,70.44) 95.6,70.44 ; 94.772,69.29 ccw(c94.772,70.321) v2@95.506,69.597 ; v2@94.966,70.134 ccw(c93.434,71.666) 95.6,71.666 ; v2@95.106,74.194 cw(c94.298,75.002) 94.298,73.86 cw(c94.298,72.718) 95.106,73.526 cw(c93.912,72.332) 95.6,72.332 ; v2@95.145,69.955 ccw(c94.047,71.053) 95.6,71.053 ; C6.2@95.2,52.74 96.35,52.74 96.385,52.775 IC2.27@96.385,57.49 96.385,60.075 v1(96.4,60.09) ; v2@95.285,73.705 cw(c94.525,72.945) 95.6,72.945 ; C6.2@95.393,52.547 cw(c95.859,52.081) 95.859,52.74 cw(c95.859,53.399) C6.2@95.393,52.933 ; 95.6,73.104 cw(c96.196,73.104) v2@95.774,73.526 ; v1@96.041,59.731 cw(c95.21,58.9) 96.385,58.9 ; C11.2@96.25,28.2 97.9,28.2 v1(97.8,28.3) ; IC2.27@96.263,56.568 cw(c95.967,56.272) 96.385,56.272 cw(c96.803,56.272) IC2.27@96.507,56.568 ; IC2.27@96.263,58.412 ccw(c95.967,58.708) 96.385,58.708 ccw(c96.803,58.708) IC2.27@96.507,58.412 ; C11.2@96.332,28.2 ccw(c96.332,29.768) v1@97.441,28.659 ; 96.385,58.827 cw(c97.663,58.827) v1@96.759,59.731 ; 96.385,59.441 cw(c97.049,59.441) v1@96.58,59.91 ; C11.2@96.443,28.007 cw(c96.909,27.541) 96.909,28.2 cw(c96.909,28.859) C11.2@96.443,28.393 ; 96.815,28.2 cw(c96.815,27.315) v1@97.441,27.941 ; 96.945,28.2 ccw(c96.945,29.155) v1@97.62,28.48 ; v1@99.241,22.059 ccw(c98.374,22.926) 99.6,22.926 ccw(c100.826,22.926) v1@99.959,22.059 ; C7.2@99.407,22.857 cw(c98.941,22.391) 99.6,22.391 cw(c100.259,22.391) C7.2@99.793,22.857 ; v1(99.6,21.7) C7.2@99.6,23.05 ; 105.607,28.893 cw(c106.034,29.319) v1(105.5,29.6) 105.5,29 106.095,28.405 ; v1@105.725,29.482 ccw(c106.353,29.151) 105.851,28.649 ; v1@105.95,29.363 ccw(c106.673,28.983) 106.095,28.405 ; IC3.4@106.778,28.283 ccw(c106.482,27.987) 106.482,28.405 ccw(c106.482,28.823) IC3.4@106.778,28.527 ; IC3.4@107.45,28.405 106.095,28.405
  Top Layer w0.3: v1@64.285,160.25 cw(c63.077,158.993) IC1_L3.4@64.821,158.993 ; v1@64.492,160.467 cw(c63.753,159.697) 64.821,159.697 ; v1(64.621,160.6) 64.821,160.4 IC1_L3.4@64.821,159.005 ; IC1_L3.4@64.697,159.129 ccw(c64.398,159.428) 64.821,159.428 ccw(c65.243,159.428) IC1_L3.4@64.944,159.129 ; 64.821,159.912 cw(c65.309,159.912) v1@64.964,160.257 ; v1@68.478,156.257 cw(c67.529,155.308) C1_L3.2@68.871,155.308 ; C1_L3.2@68.694,155.377 ccw(c68.267,155.804) 68.871,155.804 ccw(c69.474,155.804) C1_L3.2@69.047,155.377 ; v1(68.821,156.6) 68.871,156.55 C1_L3.2@68.871,155.2 ; C1_L3.2@68.871,155.55 cw(c69.871,155.55) v1@69.164,156.257 ; v1@87.385,160.25 cw(c86.177,158.993) IC1_L2.4@87.921,158.993 ; v1@87.592,160.467 cw(c86.853,159.697) 87.921,159.697 ; v1(87.721,160.6) 87.921,160.4 IC1_L2.4@87.921,159.005 ; IC1_L2.4@87.797,159.129 ccw(c87.498,159.428) 87.921,159.428 ccw(c88.343,159.428) IC1_L2.4@88.044,159.129 ; 87.921,159.912 cw(c88.409,159.912) v1@88.064,160.257 ; v1@91.578,156.257 cw(c90.629,155.308) C1_L2.2@91.971,155.308 ; C1_L2.2@91.794,155.377 ccw(c91.367,155.804) 91.971,155.804 ccw(c92.574,155.804) C1_L2.2@92.147,155.377 ; v1(91.921,156.6) 91.971,156.55 C1_L2.2@91.971,155.2 ; C1_L2.2@91.971,155.55 cw(c92.971,155.55) v1@92.264,156.257 ; C12.2@95.6,134.15 v2@96.6,134.15 ; C12.2@95.777,133.973 cw(c96.204,133.546) 96.204,134.15 cw(c96.204,134.754) C12.2@95.777,134.327 ; v2(96,138.3) R22.1@97.75,138.3 ; IC6.13@96.3,130.275 96.3,131.9 96.6,132.2 v2@96.6,134.15 ; 96.6,132.16 cw(c98.906,132.16) v2@97.311,133.825 ; 96.6,132.862 cw(c98.233,132.862) v2@97.104,134.042 ; 96.6,133.565 cw(c97.56,133.565) v2@96.896,134.258 ; v2@96.682,134.468 cw(c95.914,135.236) 95.914,134.15 cw(c95.914,133.064) 96.682,133.832 cw(c94.465,131.615) 97.6,131.615 ; v2@96.894,134.044 cw(c95.189,132.339) 97.6,132.339 ; v2@97.106,134.256 cw(c95.914,133.064) 97.6,133.064 ; v2@97.318,133.832 cw(c98.086,133.064) 98.086,134.15 cw(c98.086,135.236) 97.318,134.468 cw(c96.638,133.788) 97.6,133.788 ; IC6.11@97.6,130.275 97.6,134.05 97.7,134.15 ; IC6.9@98.9,130.275 98.9,133.7 98.45,134.15 97.7,134.15 ; IC6.7@99.55,124.725 99.55,123.45 99.9,123.1 ; v1(100,92.7) R18.1@100,94.15 ; v1(100,114.3) R20.1@100,115.65 ; 100.469,123.1 ccw(c100.469,123.801) v1@101.047,123.405 ; 100.512,123.1 cw(c100.512,122.612) v1@100.857,122.957 ; v1@100.8,123.574 cw(c99.9,124.191) 99.9,123.1 ; v1(101.2,123.3) 101,123.1 99.9,123.1 ; v1@110.364,160.25 cw(c109.157,158.993) IC1_L1.4@110.9,158.993 ; v1@110.572,160.467 cw(c109.833,159.697) 110.9,159.697 ; v1(110.7,160.6) 110.9,160.4 IC1_L1.4@110.9,159.005 ; IC1_L1.4@110.776,159.129 ccw(c110.477,159.428) 110.9,159.428 ccw(c111.322,159.428) IC1_L1.4@111.024,159.129 ; 110.9,159.912 cw(c111.388,159.912) v1@111.043,160.257 ; v1@114.557,156.257 cw(c113.608,155.308) C1_L1.2@114.95,155.308 ; C1_L1.2@114.773,155.377 ccw(c114.346,155.804) 114.95,155.804 ccw(c115.554,155.804) C1_L1.2@115.127,155.377 ; v1(114.9,156.6) 114.95,156.55 C1_L1.2@114.95,155.2 ; C1_L1.2@114.95,155.55 cw(c115.95,155.55) v1@115.243,156.257 ; v2@96.6,134.15 97.7,134.15 ; 97.7,134.15 ccw(c97.7,133.831) 97.409,133.963 cw(c97.7,133.831) 97.7,134.15 ; 97.7,134.15 cw(c97.7,134.469) 97.409,134.337 ccw(c97.7,134.469) 97.7,134.15
  Top Layer w1: CN4.GND2@3,68.66 CN4.GND1@5.54,68.66 ; CN4.GND4@3,99.14 CN4.GND3@5.54,99.14
  Bottom Layer w1: CN4.GND2@3,68.66 CN4.GND1@5.54,68.66 5.54,70.46 5.3,70.7 3.4,70.7 3,70.3 CN4.GND2@3,68.66 ; 3,96.8 CN4.GND4@3,99.14 CN4.GND3@5.54,99.14 5.54,97.04 5.2,96.7 3.1,96.7 3,96.8
  other v2: 12,6 16,6 20,6 24,6 89.6,30.2 118,34 14,38 18,38 22,38 26,38 118,38 118,42 118,46 118,50 118,54 118,58 118,62 118,66 95.3,69.8 118,70 118,74 118,78 118,82 118,86 118,90 118,94 118,98 118,102 118,106 118,110 118,114 118,118 118,122 118,126 118,130 8,132 118,134 97,134.15 8,136 118,138 8,140 18,154 22,154 26,154 30,154
FRONT_SIG_Q2: IC6.5 R21.2 R22.2 | length 28.1
  Top Layer w0.254: IC6.5@98.25,124.725 98.25,122.15 99.1,121.3 102.6,121.3 103.2,121.9 103.2,128.1 102.9,128.4 101.1,128.4 100.9,128.6 100.9,138.15 R21.2@100.7,138.35 99.3,138.35 R22.2@99.25,138.3
LASER_232RX: CN3.3 IC2.6 | length 25.6
  Top Layer w0.254: IC2.6@91.183,65.768 cw(c90.887,65.472) 91.305,65.472 cw(c91.723,65.472) IC2.6@91.427,65.768 ; IC2.6@91.305,66.69 91.305,65.085 91.8,64.59 102.7,64.59 105.01,66.9 CN3.3@108.2,66.9 ; CN3.3@107.616,66.316 ccw(c106.207,64.907) 106.207,66.9 ccw(c106.207,68.893) CN3.3@107.616,67.484 ; CN3.3@107.796,66.496 ccw(c106.82,65.52) 106.82,66.9 ccw(c106.82,68.28) CN3.3@107.796,67.304
LASER_232TX: CN3.4 IC2.7 | length 32
  Top Layer w0.254: IC2.7@89.913,65.768 cw(c89.617,65.472) 90.035,65.472 cw(c90.453,65.472) IC2.7@90.157,65.768 ; IC2.7@90.035,66.69 90.035,64.855 91.1,63.79 107.63,63.79 CN3.4@108.2,64.36 ; 104.831,63.79 ccw(c104.831,67.729) CN3.4@107.616,64.944 ; 105.444,63.79 ccw(c105.444,67.116) CN3.4@107.796,64.764 ; 106.057,63.79 ccw(c106.057,66.503) CN3.4@107.975,64.585 ; 106.671,63.79 ccw(c106.671,65.889) CN3.4@108.155,64.405 ; 107.284,63.79 ccw(c107.284,65.276) CN3.4@108.335,64.225
LASER_NCS: CN4.T21 IC2.18 TP6.1 | length 107.8
  Top Layer w0.254: CN4.T21@14.986,76.636 ccw(c14.366,77.066) 14.9,77.6 ; 15.115,77.385 cw(c14.62,76.89) CN4.T21@15.195,76.491 ; 15.33,77.17 cw(c14.873,76.714) CN4.T21@15.403,76.346 ; CN4.T21@15.7,76.28 15.7,76.8 14.9,77.6 ; v1(73.8,59.5) 73.8,60.5 ; 82.3,62.1 81.9,62.1 ; IC2.18@84.833,58.412 ccw(c84.537,58.708) 84.955,58.708 ccw(c85.373,58.708) IC2.18@85.077,58.412 ; IC2.18@84.955,57.49 84.955,61.145 84,62.1 81.9,62.1 ; 14.9,77.6 10.9,77.6 10.6,77.3 10.6,61.2 11.3,60.5 56.3,60.5 57.9,62.1 72.2,62.1 73.8,60.5 ; 73.8,60.5 80.3,60.5 81.9,62.1
LASER_RX1: CN4.T0 R6_L1.1 TP4_L1.1 | length 150.4
  Top Layer w0.254: CN4.T0@12.795,99.645 ccw(c12.277,100.36) 13.16,100.36 ; CN4.T0@13.16,99.14 13.16,100.36 ; CN4.T0@13.525,99.645 cw(c14.043,100.36) 13.16,100.36 ; TP4_L1.1@98.4,153 98.4,151.3 ; R6_L1.1@107.257,153.307 cw(c106.791,152.841) 107.45,152.841 cw(c108.109,152.841) R6_L1.1@107.643,153.307 ; R6_L1.1@107.45,153.5 107.45,152.25 106.5,151.3 98.4,151.3 ; 13.16,100.36 13.5,100.7 17,100.7 18,99.7 62.6,99.7 64,101.1 64,138.2 65.8,140 92,140 92.9,140.9 92.9,149.7 93.6,150.4 97,150.4 97.9,151.3 98.4,151.3
LASER_RX2: CN4.T7 R6_L2.1 TP4_L2.1 | length 149.9
  Top Layer w0.254: CN4.T7@15.7,91.52 19.42,91.52 19.8,91.9 19.8,93.7 20.2,94.1 55.4,94.1 56.1,94.8 v1(56.1,96.9) ; CN4.T7@16.163,91.259 cw(c16.793,90.629) 16.793,91.52 cw(c16.793,92.411) CN4.T7@16.163,91.781 ; CN4.T7@16.343,91.079 cw(c17.407,90.016) 17.407,91.52 cw(c17.407,93.024) CN4.T7@16.343,91.961 ; v1@52.441,104.659 ccw(c51.574,105.526) 52.8,105.526 ccw(c54.026,105.526) v1@53.159,104.659 ; v1(52.8,104.3) 52.8,140.5 54.2,141.9 83.5,141.9 84.471,142.871 84.471,144 ; v1@55.741,96.541 cw(c54.874,95.674) 56.1,95.674 cw(c57.326,95.674) v1@56.459,96.541 ; v1(81.8,144) 84.471,144 ; R6_L2.1@84.278,153.307 cw(c83.811,152.841) 84.471,152.841 cw(c85.13,152.841) R6_L2.1@84.664,153.307 ; R6_L2.1@84.471,153.5 84.471,144
  Bottom Layer w0.254: v1(52.8,104.3) 55.4,104.3 56.1,103.6 v1(56.1,96.9) ; v1@53.159,103.941 cw(c54.026,103.074) 54.026,104.3 cw(c54.026,105.526) v1@53.159,104.659 ; v1@55.741,97.259 ccw(c54.874,98.126) 56.1,98.126 ccw(c57.326,98.126) v1@56.459,97.259
LASER_RX3: CN4.T9 R6_L3.1 TP4_L3.1 | length 127.5
  Top Layer w0.254: 14.852,88.052 ccw(c14.141,88.762) CN4.T9@15.133,88.921 ; CN4.T9@14.882,88.881 cw(c13.535,88.665) 14.5,87.7 ; 14.916,88.116 cw(c15.497,87.535) CN4.T9@15.497,88.357 ; CN4.T9@15.7,88.98 15.7,88.9 14.5,87.7 ; v1(48.9,147.7) 48.8,147.6 46.6,147.6 ; R6_L3.1@61.178,153.307 cw(c60.711,152.841) 61.371,152.841 cw(c62.03,152.841) R6_L3.1@61.564,153.307 ; R6_L3.1@61.371,153.5 61.371,151.771 61,151.4 47.6,151.4 46.6,150.4 46.6,147.6 ; 14.5,87.7 10.5,87.7 10.1,88.1 10.1,101 10.7,101.6 45.5,101.6 46.6,102.7 46.6,147.6
LASER_SPI_MISO: CN4.T12 IC2.16 TP9.1 | length 121.6
  Top Layer w0.254: CN4.T12@2.416,83.316 ccw(c1.007,81.907) 1.007,83.9 ccw(c1.007,85.893) CN4.T12@2.416,84.484 ; CN4.T12@2.596,83.496 ccw(c1.62,82.52) 1.62,83.9 ccw(c1.62,85.28) CN4.T12@2.596,84.304 ; CN4.T12@3,83.9 -0.1,83.9 -0.5,83.5 -0.5,57.8 0.3,57 64.1,57 TP9.1@66.6,54.5 80.8,54.5 82.415,56.115 IC2.16@82.415,57.49 ; IC2.16@82.293,56.568 cw(c81.997,56.272) 82.415,56.272 cw(c82.833,56.272) IC2.16@82.537,56.568
LASER_SPI_MOSI: CN4.T11 IC2.15 TP8.1 | length 124.4
  Top Layer w0.254: CN4.T11@15.7,86.44 20.36,86.44 21.1,85.7 21.1,77.1 21.7,76.5 67.1,76.5 v1(69.6,79) ; CN4.T11@16.163,86.179 cw(c16.793,85.549) 16.793,86.44 cw(c16.793,87.331) CN4.T11@16.163,86.701 ; CN4.T11@16.343,85.999 cw(c17.407,84.936) 17.407,86.44 cw(c17.407,87.944) CN4.T11@16.343,86.881 ; v1@69.092,79 cw(c67.866,79) 68.733,78.133 cw(c69.6,77.266) v1@69.6,78.492 ; TP8.1@76.341,77.541 cw(c75.474,76.674) 76.7,76.674 cw(c77.926,76.674) TP8.1@77.059,77.541 ; 76.7,63.666 ccw(c78.066,63.666) v1(77.1,62.7) 76.7,63.1 v1(76.7,77.9) ; 76.7,64.279 ccw(c78.679,64.279) v1@77.28,62.88 ; 76.7,64.892 ccw(c79.292,64.892) v1@77.459,63.059 ; v1@77.02,57.82 ccw(c77.818,58.618) 77.818,57.49 ; v1@77.38,58.18 ccw(c79.044,59.844) 79.044,57.49 ; v1@77.417,57.541 cw(c77.528,57.308) 77.71,57.49 ; v1@77.559,58.359 ccw(c79.658,60.458) 79.658,57.49 ; v1@77.659,57.783 ccw(c77.892,57.672) 77.71,57.49 ; 78.431,57.49 cw(c78.431,59.231) v1(77.2,58) 77.71,57.49 ; IC2.15@81.023,57.368 ccw(c80.727,57.072) 80.727,57.49 ccw(c80.727,57.908) IC2.15@81.023,57.612 ; IC2.15@81.145,57.49 77.71,57.49
  Bottom Layer w0.254: v1(69.6,79) 75.6,79 v1(76.7,77.9) ; v1@69.959,78.641 cw(c70.826,77.774) 70.826,79 cw(c70.826,80.226) v1@69.959,79.359 ; v1@76.192,77.9 ccw(c74.966,77.9) 75.833,78.767 ccw(c76.7,79.634) v1@76.7,78.408 ; v1@76.741,62.341 cw(c75.632,61.232) 77.2,61.232 ; v1@76.841,58.359 ccw(c75.974,59.226) 77.2,59.226 ccw(c78.426,59.226) v1@77.559,58.359 ; v1@76.92,62.52 cw(c76.245,61.845) 77.2,61.845 ; v1(77.1,62.7) 77.2,62.6 v1(77.2,58) ; 77.2,61.715 cw(c78.085,61.715) v1@77.459,62.341